# Altium PCB TK520_GDT-Trafo.PcbDoc
Units mm, origin at the board's own origin, x right, y up, seen from the top; angles counter-clockwise.
Board outline 45 x 60 mm, 2 copper layers (Top Layer, Bottom Layer); 5 components, 8 nets, 26 pads, 0 vias.
Unrouted connection lines stored in the file: 2.
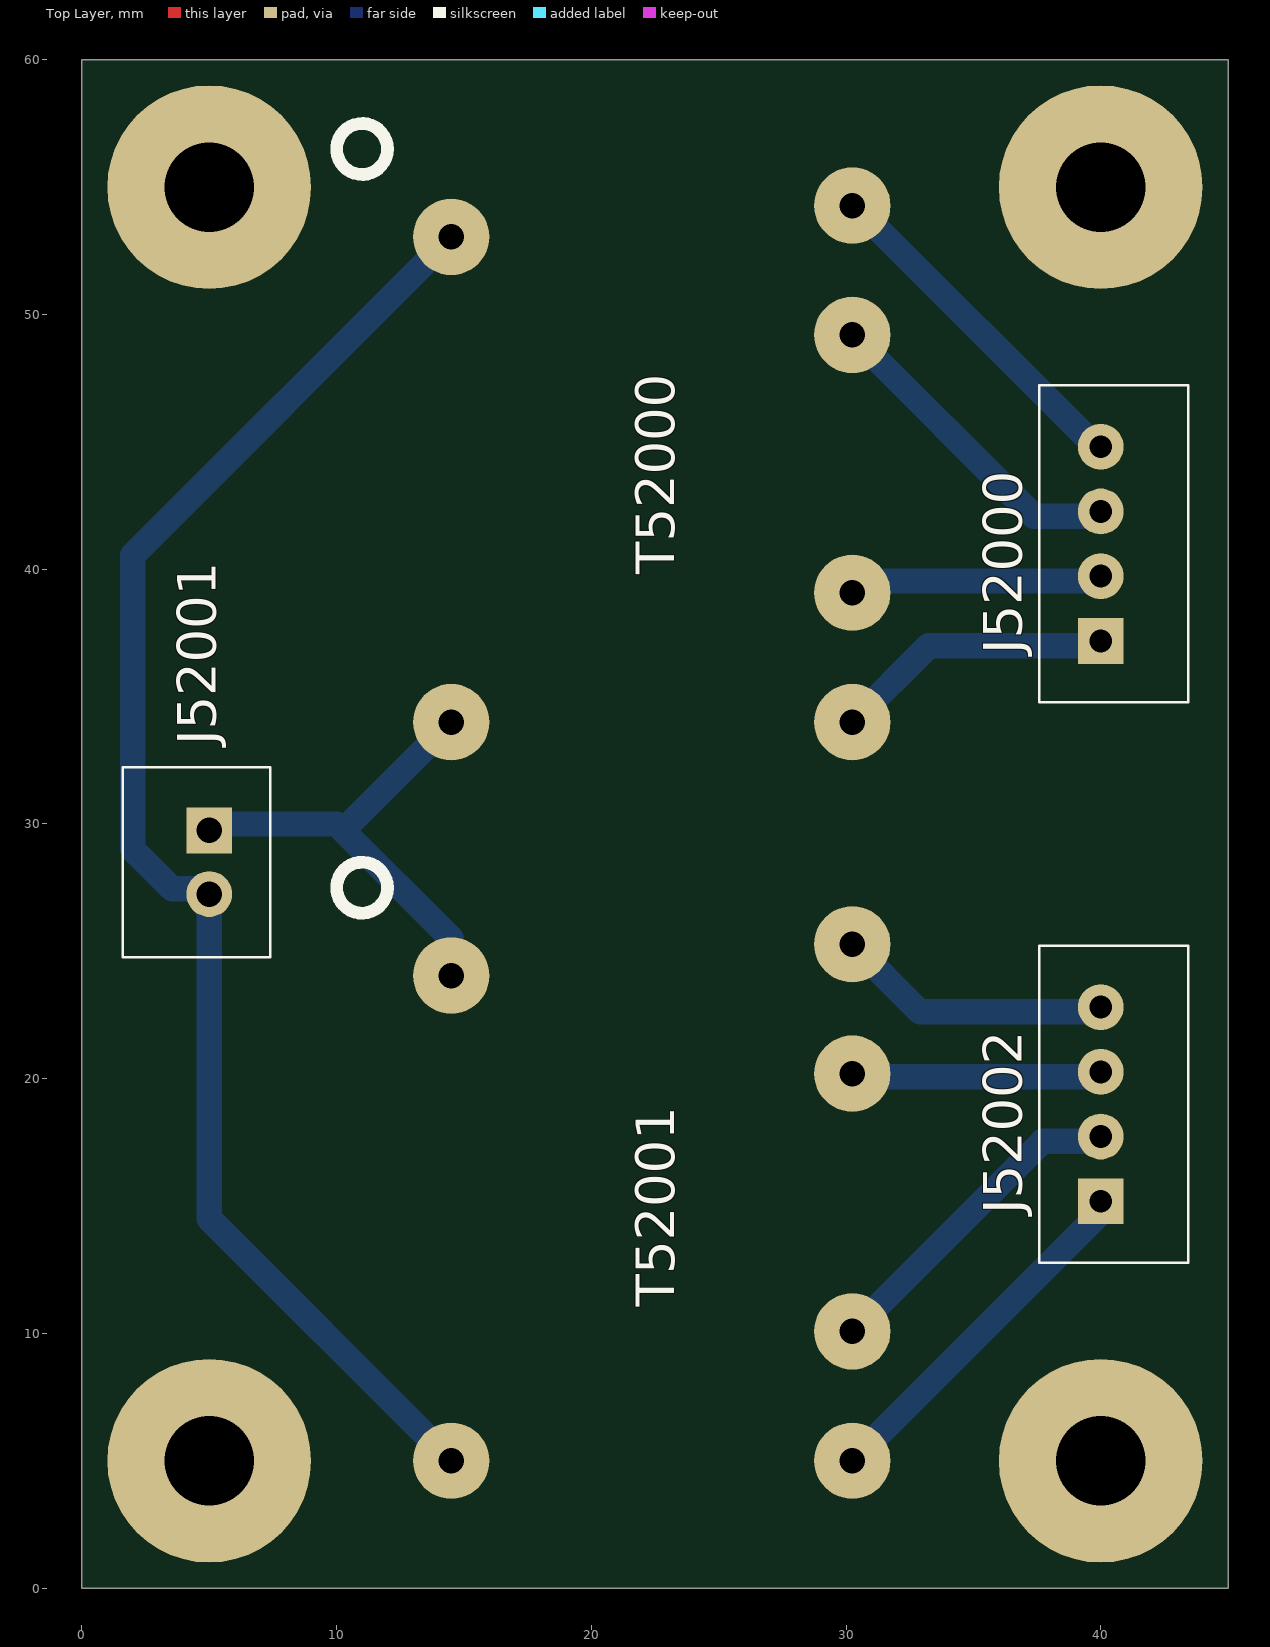
[diagram p0: Top Layer view]
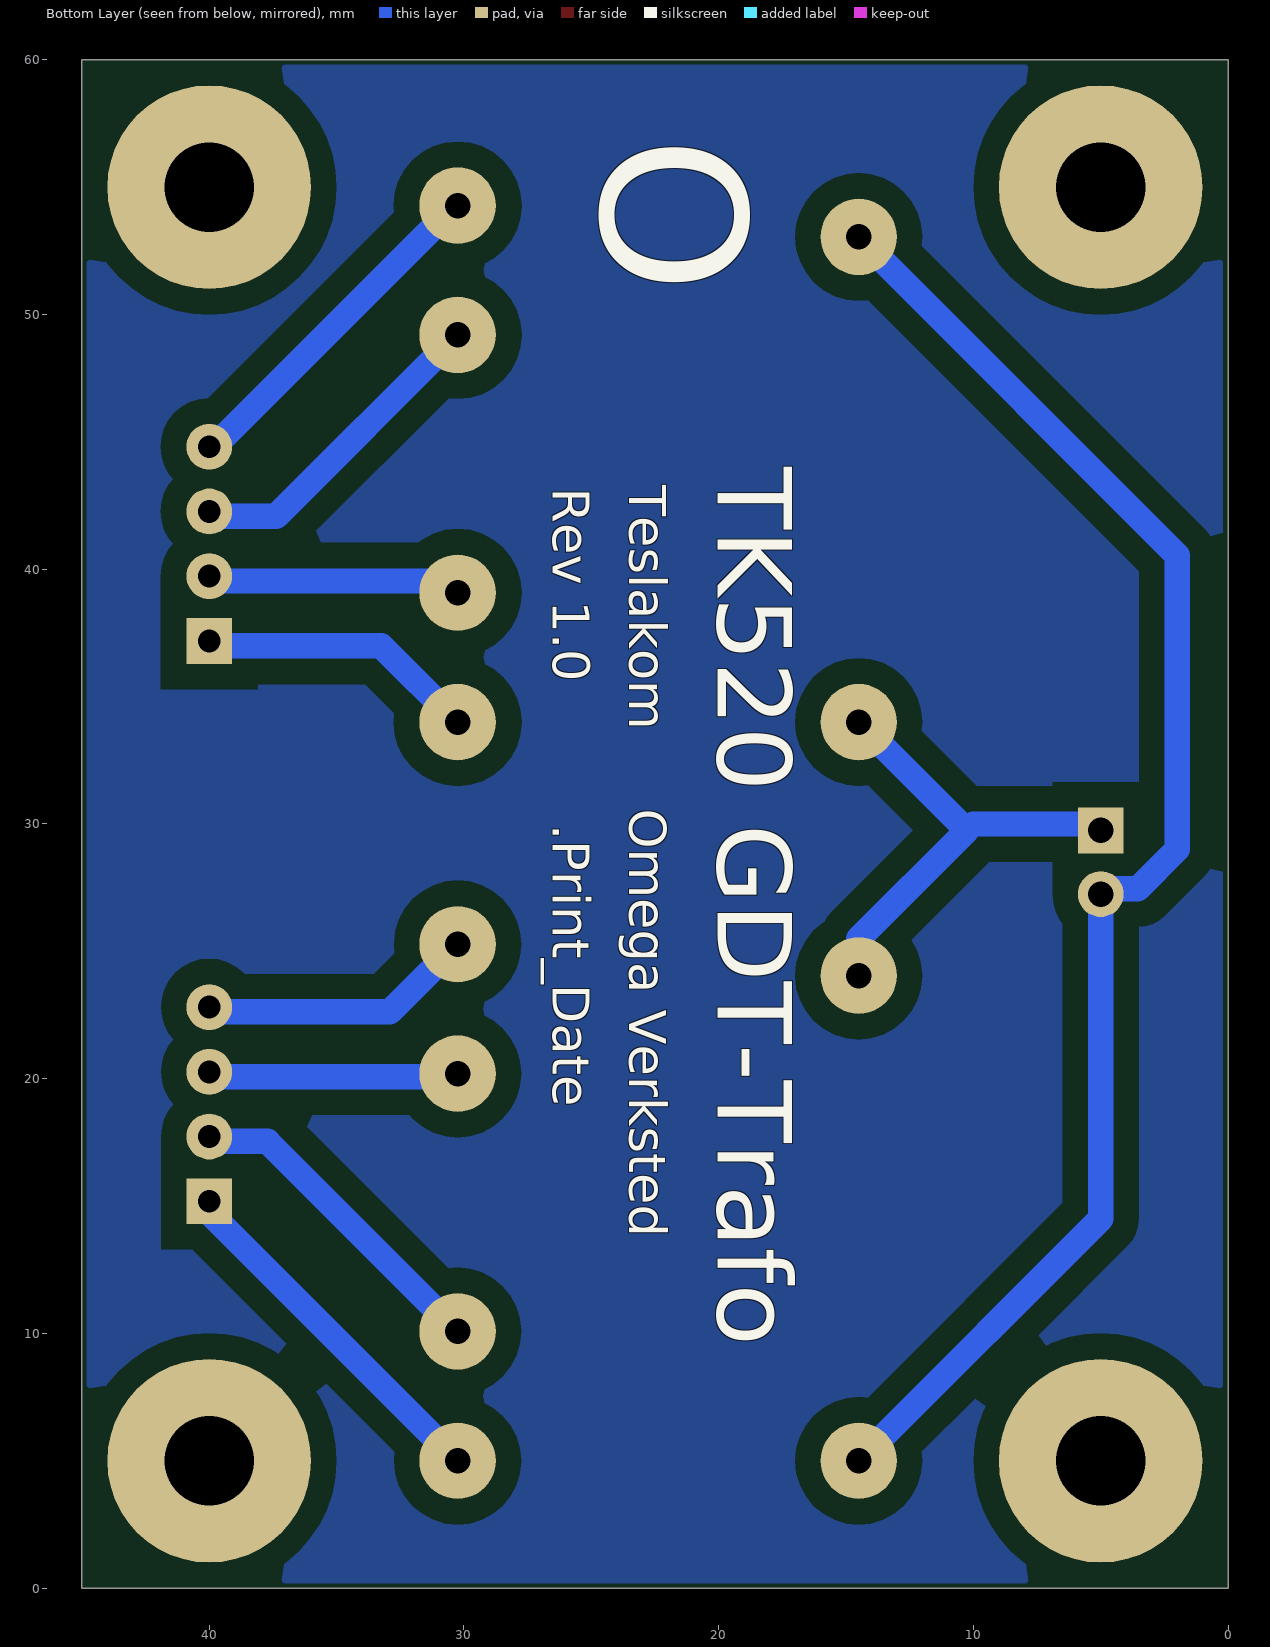
[diagram p1: Bottom Layer view, seen from below]
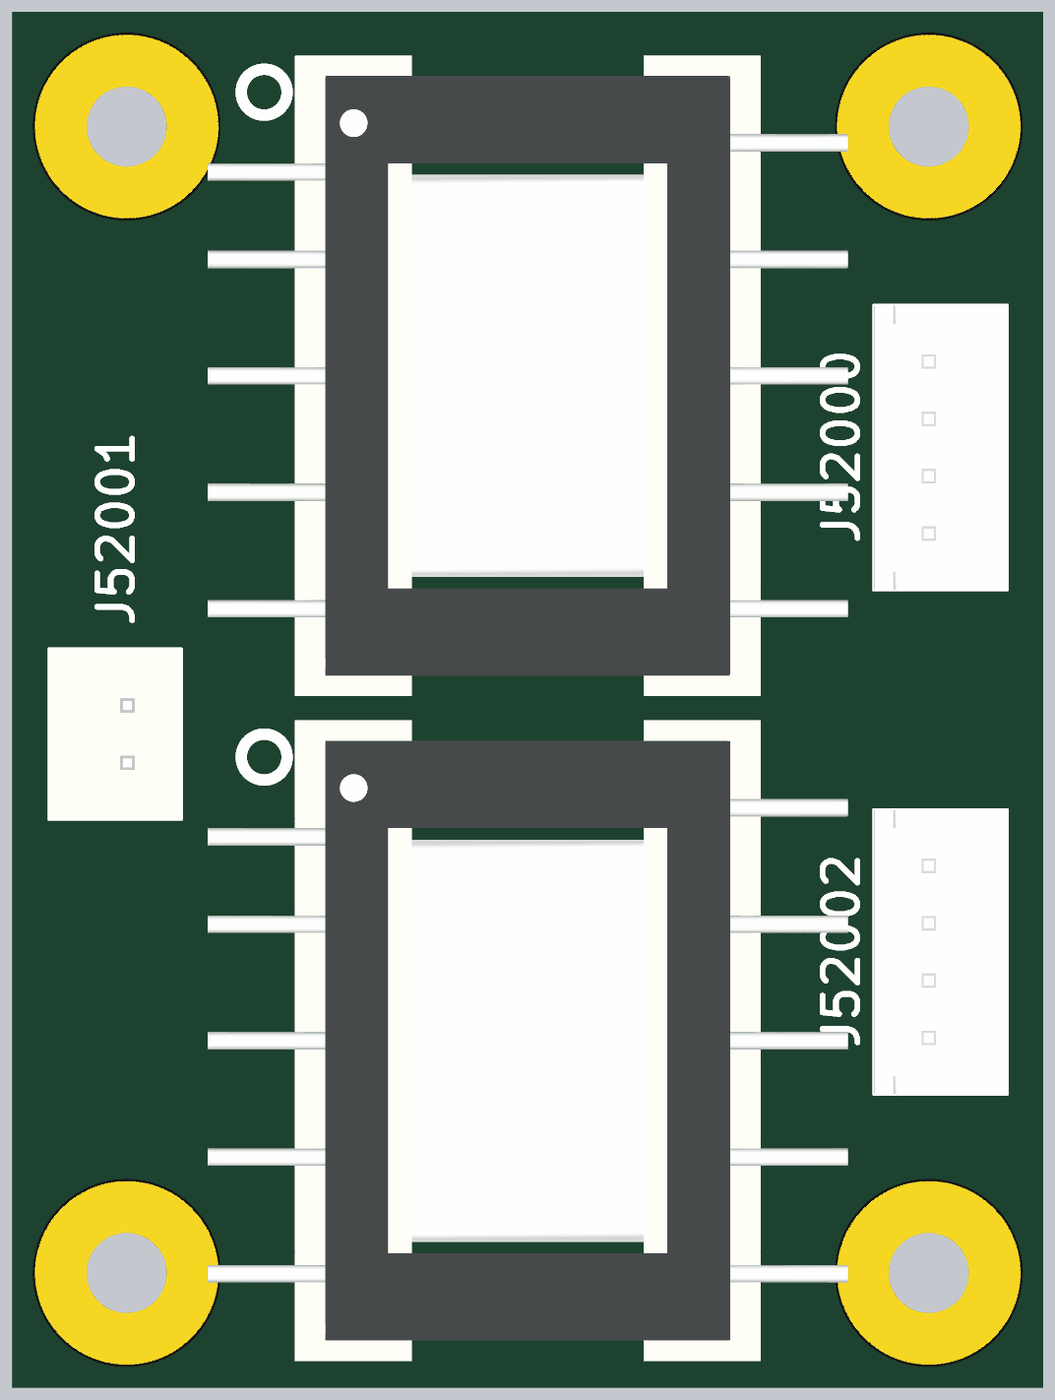
[diagram p2: 3D render of the assembled board from above, using the file's embedded part models]

## Layer stack, top to bottom
Top Solder: solder mask 0.0102, Solder Resist, Dk 3.5
Top Layer: signal copper 0.0356
Dielectric1: dielectric 0.32, FR-4, Dk 4.8
Bottom Layer: signal copper 0.0356
Bottom Solder: solder mask 0.0102, Solder Resist, Dk 3.5

## Board outline
0,0 0,60 45,60 45,0 0,0

## Design rules (kind name [scope] priority, off if disabled: settings)
Clearance [All] p1: gap=0.5 ignorepadtopadclearanceinfootprint=FALSE except(0: Arc-Hole Track-Hole SMDPad-Hole THPad-Hole Via-Hole Fill-Hole Poly-Hole Region-Hole Text-Hole; 1: Track-Poly THPad-Poly)
Height [All] p1: minheight=0 maxheight=100 prefheight=12.7
PolygonConnect [All] p1: connectstyle=Relief reliefconductorwidth=0.254 reliefentries=4 polygonreliefangle="90 Angle" airgapwidth=0.254
RoutingVias [All] p1: holewidth=0.711 width=1.27 viastyle="Through Hole" minholewidth=0.711 minwidth=1.27 maxholewidth=0.711 maxwidth=1.27
SolderMaskExpansion [All] p1: expansion=0.102 istentingtop=FALSE
Width [All] p1: maxlimit=5 minlimit=0.4 preferedwidth=1
29 further rules are at their usual default settings.

## Components (designator, comment, footprint, x,y, rotation, side; value= is the part's Value field where it differs from the comment)
J52000 "B4B-XH-A (LF)(SN)" JST_4P 40,41 r0 top
J52001 "B2B-XH-A (LF)(SN)" JST_2P 5,28.5 r180 top
J52002 "B4B-XH-A (LF)(SN)" JST_4P 40,19 r0 top
T52000 "Dual Gate Drive Transformer" SD250-3 14.5,34 r0 top
T52001 "Dual Gate Drive Transformer" SD250-3 14.5,5 r0 top

## Footprints (in the part's own frame and the unit in brackets; to place one, negate y for a bottom-side part, rotate by r counter-clockwise, add the part's x,y. Pads: shape width x height; smd on the part's side, far side on the other; paste and mask are expansions set on the pad)
JST_2P [mm]
  rect 1.8x1.8 hole 1: 1(0,-1.25)
  round 1.8 hole 1: 2(0,1.25)
  silkscreen extent -2.4,-3.73 3.4,3.73, body extent -2.4,-3.7 3.35,3.7, height 7
JST_4P [mm]
  rect 1.8x1.8 hole 0.9: 1(0,-3.81)
  round 1.8 hole 0.9: 2(0,-1.27) 3(0,1.27) 4(0,3.81)
  silkscreen extent -2.41,-6.22 3.43,6.22, body extent -2.35,-6.2 3.4,6.2, height 7
SD250-3 [mm]
  round 3 hole 1: 1(0,0) 5(0,19.05) 6(15.75,0) 7(15.75,5.08) 9(15.75,15.2) 10(15.75,20.28)
  body extent -5.97,-3.84 21.97,24.1, height 24.13

## Part data
J52000 J52002: library part 3046, "JST 4pin (pris pr. stk.)", antall=94, dybde=0, hylle=6, id=3046, komponenttype=11, lager_type=Fremlager, leverandor=Farnell, leverandor_varenr=1516278, navn="B4B-XH-A (LF)(SN)", nokkelord="Connector, Kontakt", pakke_opprettet="28/06/2014 18:25:23", pakke_opprettet_av=815, pakketype=TH, pris=2, produsent=JST, rad=3, rom=OV, symbol_opprettet="28/06/2014 15:33:28", symbol_opprettet_av=815
J52001: library part 4043, "JST 2pin (pris pr. stk.)", antall=120, dybde=0, hylle=6, id=4043, komponenttype=11, lager_type=Fremlager, leverandor=Farnell, leverandor_varenr=1516276, navn="B2B-XH-A (LF)(SN)", nokkelord="Connector, Kontakt", pakke_opprettet="28/06/2014 18:25:03", pakke_opprettet_av=815, pakketype=TH, pris=2, produsent=JST, rad=3, rom=OV, symbol_opprettet="28/06/2014 15:33:17", symbol_opprettet_av=815
T52000 T52001: library part 3215, "Dual gate drive transformer", id=3215, komponenttype=3, navn=SD250-3, nokkelord="GDT, Tesla", pakke_opprettet="28/06/2014 18:37:26", pakke_opprettet_av=815, pakketype=TH, pris=100, produsent=Coilcraft, symbol_opprettet="28/06/2014 15:27:34", symbol_opprettet_av=815

## Free pads (board coordinates)
  round 8 hole 3.5: 0(5,5) 0(5,55) 0(40,5) 0(40,55)

## Nets (pads, with @x,y where several pads share a name; then routed paths per layer and width w, separated by ;. In a path a pad name is that pad's centre, name@x,y a point inside that pad or via, vN(x,y) a via of type N, cw(c..) or ccw(c..) an arc to the next point about the centre after c; other vN are vias at no path point)
GDT_A1_OUT: J52000.2 T52000.7 | length 10.4
  Bottom Layer w1: T52000.7@29.75,39.08 30.21,39.54 J52000.2@40,39.54
GDT_A2_OUT: J52000.1 J52000.4 T52000.6 T52000.10 | length 25.7
  Bottom Layer w1: T52000.6@29.75,34 T52000.6 33.25,37 J52000.1@40,37 ; T52000.10@29.75,54.28 30.34,54.28 J52000.4@40,44.62
GDT_A3_OUT: J52002.2 T52001.7 | length 13.3
  Bottom Layer w1: T52001.7@29.75,10.08 T52001.7 37.71,17.54 J52002.2@40,17.54
GDT_A4_OUT: J52002.1 J52002.4 T52001.6 T52001.10 | length 25.9
  Bottom Layer w1: T52001.6@29.75,5 T52001.6 40,14.75 J52002.1@40,15 ; T52001.10@29.75,25.28 T52001.10 32.91,22.62 J52002.4@40,22.62
GDT_A_IN: J52001.1 T52000.1 T52001.5 | length 18.5
  Bottom Layer w1: J52001.1@5,30 10,30 ; T52001.5@14,24.05 14.5,24.55 14.5,25.5 10.25,29.75 14,33.5 T52000.1@14,34
GDT_B2_OUT: J52000.3 T52000.9 | length 13.2
  Bottom Layer w1: T52000.9@29.75,49.2 T52000.9 37.37,42.08 J52000.3@40,42.08
GDT_B4_OUT: J52002.3 T52001.9 | length 10.3
  Bottom Layer w1: T52001.9@29.75,20.2 29.87,20.08 J52002.3@40,20.08
GDT_B_IN: J52001.2 T52000.5 T52001.1 | length 58.8
  Bottom Layer w1: T52001.1@14,5 14,5.5 5,14.5 5,27.46 3.54,27.46 2,29 2,40.55 14,52.55 T52000.5@14,53.05

## Polygon pours and split planes (outlines as drawn)
no net on Bottom Layer "B" (solid, pour order 2): 0.2,0.2 0.2,59.8 44.8,59.8 44.8,0.2

## Silkscreen, mask and mechanical layers (free items; w line width, h text height)
Top Overlay:
  circle w0.5: c11,56.5 r1
  circle w0.5: c11,27.5 r1
Bottom Overlay:
  text "O" at 26.5,57 h10 r90
  text "TK520 GDT-Trafo" at 21,44 h5 r90
  text "Teslakom" at 24,43.3 h2.5 r90
  text "Rev 1.0" at 27,43.2 h2.5 r90
  text "Omega Verksted" at 24,30.6 h2.5 r90
  text ".Print_Date" at 27,30 h2.5 r90
Mechanical 1:
  the board outline again, w0.1